# Altium PCB Injection_PCB.PcbDoc
Units mil, origin at the board's own origin, x right, y up, seen from the top; angles counter-clockwise.
Board outline 4645 x 2960 mil, 2 copper layers (Top Layer, Bottom Layer); 32 components, 45 nets, 272 pads, 86 vias.
Unrouted connection lines stored in the file: 66.
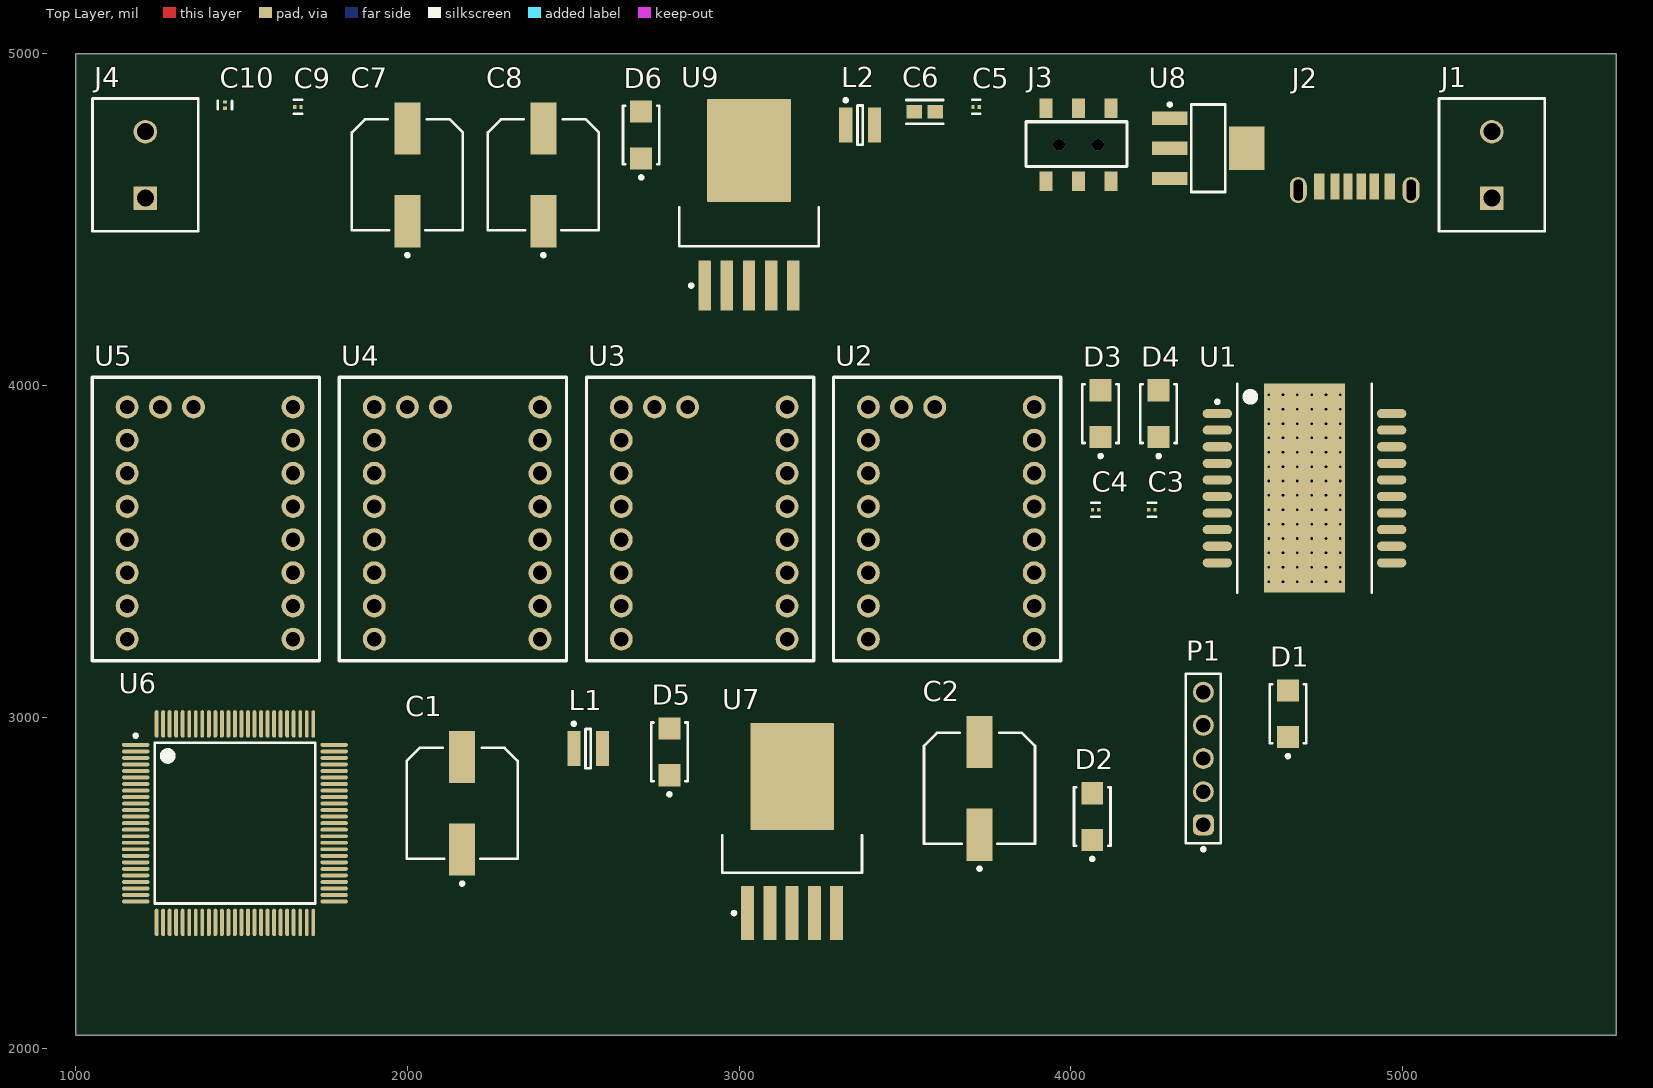
[diagram p0: Top Layer view]
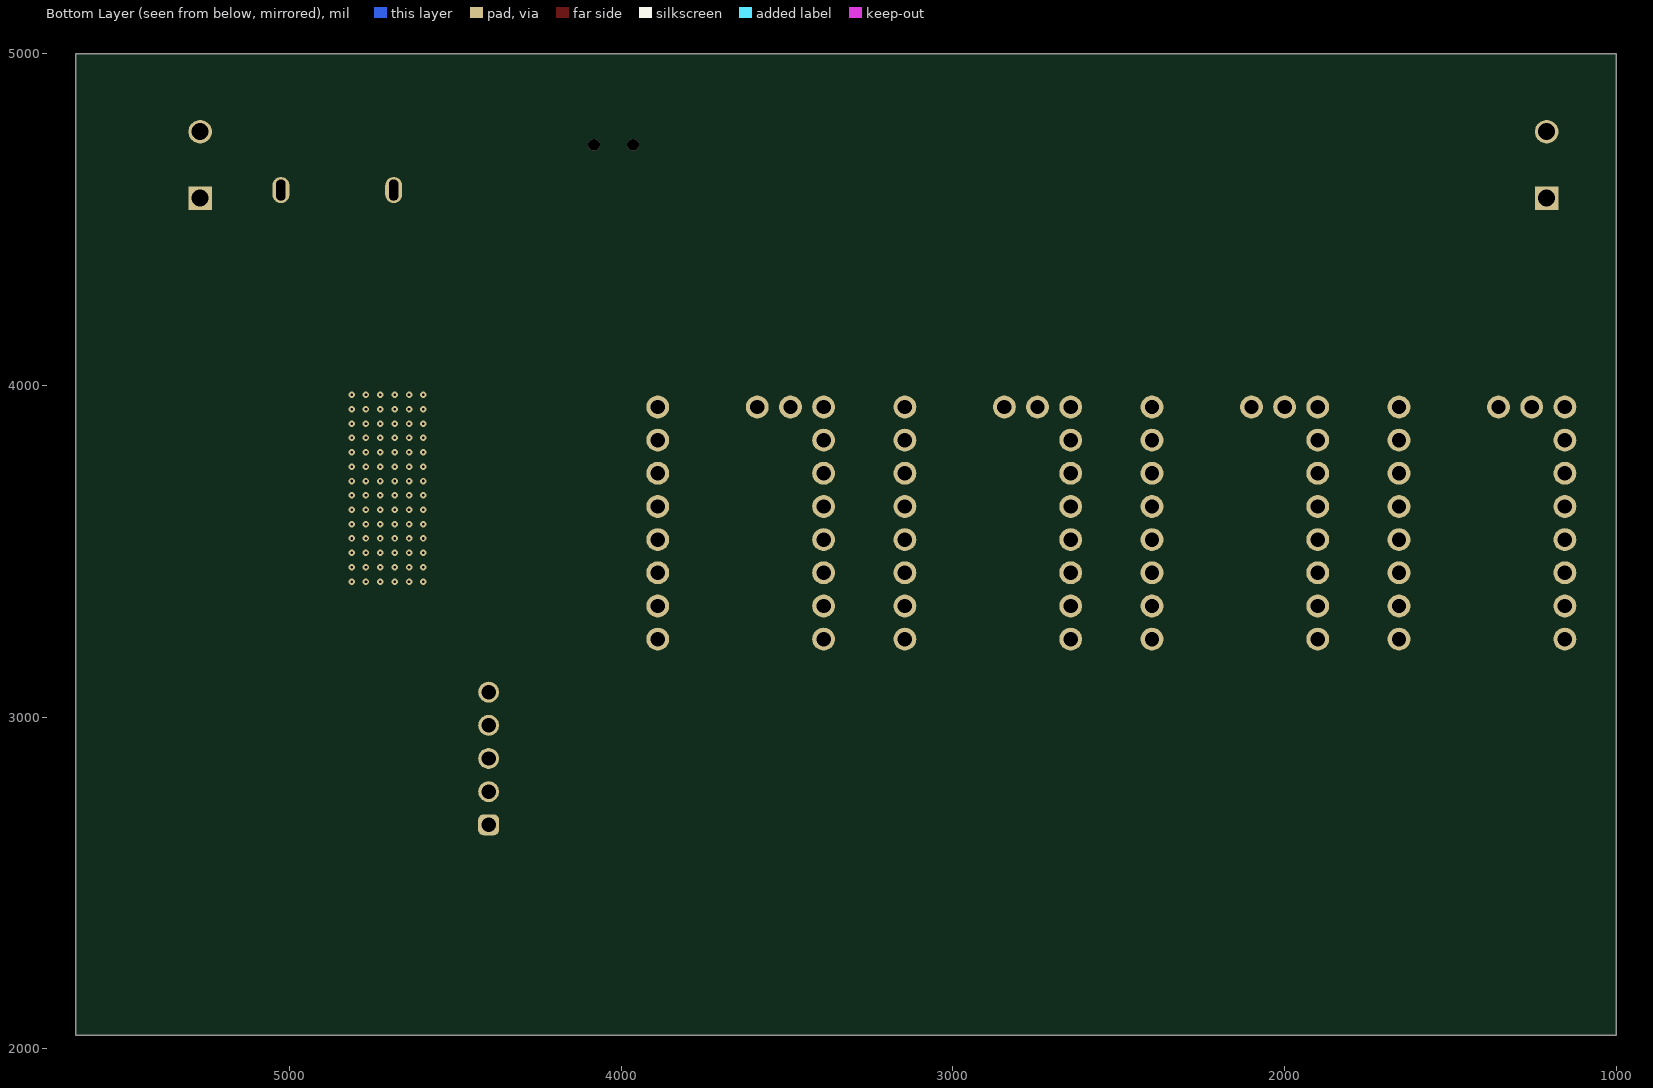
[diagram p1: Bottom Layer view, seen from below]

## Layer stack, top to bottom
Top Solder: solder mask 0.4, Solder Resist, Dk 3.5
Top Layer: signal copper 1.4
Dielectric 1: dielectric 12.6, FR-4, Dk 4.8
Bottom Layer: signal copper 1.4
Bottom Solder: solder mask 0.4, Solder Resist, Dk 3.5

## Board outline
1000,2040 5645,2040 5645,5000 1000,5000

## Design rules (kind name [scope] priority, off if disabled: settings)
Clearance [All] p1: gap=10 ignorepadtopadclearanceinfootprint=FALSE
PolygonConnect [All] p1: connectstyle=Relief reliefconductorwidth=10 reliefentries=4 polygonreliefangle="90 Angle" airgapwidth=10
RoutingVias [All] p1: holewidth=28 width=50 viastyle="Through Hole" minholewidth=28 minwidth=50 maxholewidth=28 maxwidth=50
SolderMaskExpansion [All] p1: expansion=4 istentingtop=FALSE
SupplyNets "Schematic Supply Nets_4" [InNet('GND')] p1: voltage=0.000
SupplyNets "Schematic Supply Nets_3" [InNet('+5')] p2: voltage=0.000
SupplyNets "Schematic Supply Nets_2" [InNet('+3.3')] p3: voltage=0.000
SupplyNets "Schematic Supply Nets_1" [InNet('+24')] p4: voltage=0.000
SupplyNets "Schematic Supply Nets" [InNet('VBUS')] p5: voltage=0.000
Width [All] p1: maxlimit=10 minlimit=10 preferedwidth=10
30 further rules are at their usual default settings.

## Classes and differential pairs
component class Power: C1 C2 C6 C7 C8 D5 D6 J1 J2 J3 J4 L1 L2 U7 U8 U9
component class Motor_Drivers: D1 D2 D3 D4 P1 U1 U2 U3 U4 U5
component class MCU: U6

## Components (designator, comment, footprint, x,y, rotation, side; value= is the part's Value field where it differs from the comment)
C1 "EEEFT1E471AP" FP-FTF-MFG 2165,2740 r90 top
C2 "EEEFT1E471AP" FP-FTF-MFG 3725,2785 r90 top
C3 "GRM033R60J104KE19D" FP-GRM033-0_03-MFG 4245,3625 r0 top
C4 "GRM033R60J104KE19D" FP-GRM033-0_03-MFG 4075,3625 r0 top
C5 "GRM033R60J104KE19D" FP-GRM033-0_03-MFG 3715,4840 r0 top
C6 "GRM188R60J106ME47D" FP-GRM188-0_1-e0_2_0_55-IPC_A 3560,4825 r0 top
C7 "EEEFT1E471AP" FP-FTF-MFG 2000,4635 r90 top
C8 "EEEFT1E471AP" FP-FTF-MFG 2410,4635 r90 top
C9 "GRM033R60J104KE19D" FP-GRM033-0_03-MFG 1670,4840 r0 top
C10 "GRM033R60J104KE19D" FP-GRM033-0_03-MFG 1450,4845 r90 top
D1 "SSA34-E3/61T" FP-95400-MFG 4655,3010 r90 top
D2 "SSA34-E3/61T" FP-95400-MFG 4065,2700 r90 top
D3 "SSA34-E3/61T" FP-95400-MFG 4090,3915 r90 top
D4 "SSA34-E3/61T" FP-95400-MFG 4265,3915 r90 top
D5 "SSA34-E3/61T" FP-95400-MFG 2790,2895 r90 top
D6 "SSA34-E3/61T" FP-95400-MFG 2705,4755 r90 top
J1 "1729128" PHOE-1729128-2_V 5270,4665 r90 top
J2 "USBC" USBC 4750,4600 r0 top
J3 "SWITCH" PCBComponent_1 3925,4615 r0 top
J4 "1729128" PHOE-1729128-2_V 1210,4665 r90 top
L1 "SRN3015-330M" BOUR-SRN3015-2_V 2545,2905 r0 top
L2 "SRN3015-470M" BOUR-SRN3015-2_V 3365,4785 r0 top
P1 "61300511121" 61300511121 4400,2875 r90 top
U1 "L298P" STM-PowerSO20_M 4705,3690 r0 top
U2 "TMC2209" TCM2209_breakout 3390,3235 r0 top
U3 "TMC2209" TCM2209_breakout 2645,3235 r0 top
U4 "TMC2209" TCM2209_breakout 1900,3235 r0 top
U5 "TMC2209" TCM2209_breakout 1155,3235 r0 top
U6 "STM32F407VET6" STM-LQFP100_M 1480,2680 r0 top
U7 "LM2596S-3.3" KTT0005B_N 3160,2655 r90 top
U8 "LD1117AS33TR" SOT-223_M 4415,4715 r0 top
U9 "LM2596S-5.0" KTT0005B_L 3030,4545 r90 top

## Footprints (in the part's own frame and the unit in brackets; to place one, negate y for a bottom-side part, rotate by r counter-clockwise, add the part's x,y. Pads: shape width x height; smd on the part's side, far side on the other; paste and mask are expansions set on the pad)
61300511121 [mm] "Pin Header, pitch 2.54 mm, THT, Vertical, single row, 5p"
  rrect50% 1.6x1.6 hole 1.1: 1(-5.08,0)
  round 1.6 hole 1.1: 2(-2.54,0) 3(0,0) 4(2.54,0) 5(5.08,0)
  silkscreen extent -7.07,-1.35 6.5,1.35, body extent -6.35,-1.27 6.35,1.27, height 8.57
BOUR-SRN3015-2_V [mm] "SMD, 2-Leads, Body 3x3mm, Height 1.5mm"
  rect 1x2.7 smd: 1(-1.1,0) 2(1.1,0)
  silkscreen extent -1.22,-1.5 0.2,2.02, body extent -1.5,-1.5 1.5,1.5, height 1.5
FP-95400-MFG [mm]
  rect 1.7x1.68 smd paste+0 mask+0: 1(-1.79,0) 2(1.79,0)
  silkscreen extent -3.37,-1.4 2.25,1.4, body extent -2.74,-1.5 2.74,1.5, height 0.25
FP-FTF-MFG [mm]
  rect 4x2 smd paste+0 mask+0: 1(-3.55,0) 2(3.55,0)
  silkscreen extent -6.27,-4.25 4.25,4.25, body extent -5.8,-4.5 5.8,4.5, height 0.25
FP-GRM033-0_03-MFG [mm]
  rect 0.25x0.3 smd paste+0 mask+0: 1(-0.238,0) 2(0.238,0)
  silkscreen extent -0.32,-0.54 0.32,0.54, body extent -0.46,-0.27 0.46,0.27, height 0.25
FP-GRM188-0_1-e0_2_0_55-IPC_A [mil]
  rect 47.57x39.85 smd paste+0 mask+0: 1(-31.57,0) 2(31.57,0)
  silkscreen extent -55,-36 55,36, body extent -75,-40 75,40, height 10
KTT0005B_L [mm] "DPAK, 5-Leads, Body 10.65x9.65mm, Pitch 1.7mm, IPC High Density"
  rrect11% 3.85x0.95 smd: 1(-6.2,3.4) 2(-6.2,1.7) 3(-6.2,0) 4(-6.2,-1.7) 5(-6.2,-3.4)
  rrect2% 7.9x6.4 smd: 6(4.15,0)
  silkscreen extent -6.32,-5.35 -0.2,5.35, body extent -3.2,-5.32 6.45,5.33, height 4.83
KTT0005B_N [mm] "DPAK, 5-Leads, Body 10.65x9.65mm, Pitch 1.7mm, IPC Medium Density"
  rrect10% 4.15x1 smd: 1(-6.25,3.4) 2(-6.25,1.7) 3(-6.25,0) 4(-6.25,-1.7) 5(-6.25,-3.4)
  rrect2% 8.2x6.4 smd: 6(4.2,0)
  silkscreen extent -6.37,-5.35 -0.3,5.35, body extent -3.15,-5.32 6.5,5.33, height 4.83
PCBComponent_1 [mm]
  rect 1x1.5 smd: 1(0,0) 2(2.5,0) 3(5,0) 4(0,5.6) 5(2.5,5.6) 6(5,5.6)
  silkscreen extent -1.52,1.14 6.22,4.57
PHOE-1729128-2_V [mm] "Receptacle, 2-Leads, Body 8.1x10.16mm, Pitch 5.08mm"
  rect 1.8x1.8 hole 1.3: 1(-2.54,0)
  round 1.8 hole 1.3: 2(2.54,0)
  silkscreen extent -5.08,-4.05 5.08,4.05, body extent -5.65,-4.05 5.08,4.05, height 10.01
SOT-223_M [mm] "SOT223, 4-Leads, Body 6.5x3.5mm, Pitch 2.3mm, Lead Span 7mm, IPC Low Density"
  rect 2.7x1 smd: 1(-2.95,2.3) 2(-2.95,0) 3(-2.95,-2.3)
  rect 2.7x3.3 smd: 4(2.95,0)
  silkscreen extent -3.07,-3.35 1.3,3.47, body extent -1.85,-3.35 1.85,3.35, height 1.8
STM-LQFP100_M [mm] "Thin QFP, 100-Leads, Body 14x14mm, Pitch 0.5mm, IPC Low Density"
  oval 2.1x0.3 smd: 1(-7.6,6) 2(-7.6,5.5) 3(-7.6,5) 4(-7.6,4.5) 5(-7.6,4) 6(-7.6,3.5) 7(-7.6,3) 8(-7.6,2.5) 9(-7.6,2) 10(-7.6,1.5) 11(-7.6,1) 12(-7.6,0.5) 13(-7.6,0) 14(-7.6,-0.5) 15(-7.6,-1) 16(-7.6,-1.5) 17(-7.6,-2) 18(-7.6,-2.5) 19(-7.6,-3) 20(-7.6,-3.5) 21(-7.6,-4) 22(-7.6,-4.5) 23(-7.6,-5) 24(-7.6,-5.5) 25(-7.6,-6) 51(7.6,-6) 52(7.6,-5.5) 53(7.6,-5) 54(7.6,-4.5) 55(7.6,-4) 56(7.6,-3.5) 57(7.6,-3) 58(7.6,-2.5) 59(7.6,-2) 60(7.6,-1.5) 61(7.6,-1) 62(7.6,-0.5) 63(7.6,0) 64(7.6,0.5) 65(7.6,1) 66(7.6,1.5) 67(7.6,2) 68(7.6,2.5) 69(7.6,3) 70(7.6,3.5) 71(7.6,4) 72(7.6,4.5) 73(7.6,5) 74(7.6,5.5) 75(7.6,6)
  oval 0.3x2.1 smd: 26(-6,-7.6) 27(-5.5,-7.6) 28(-5,-7.6) 29(-4.5,-7.6) 30(-4,-7.6) 31(-3.5,-7.6) 32(-3,-7.6) 33(-2.5,-7.6) 34(-2,-7.6) 35(-1.5,-7.6) 36(-1,-7.6) 37(-0.5,-7.6) 38(0,-7.6) 39(0.5,-7.6) 40(1,-7.6) 41(1.5,-7.6) 42(2,-7.6) 43(2.5,-7.6) 44(3,-7.6) 45(3.5,-7.6) 46(4,-7.6) 47(4.5,-7.6) 48(5,-7.6) 49(5.5,-7.6) 50(6,-7.6) 76(6,7.6) 77(5.5,7.6) 78(5,7.6) 79(4.5,7.6) 80(4,7.6) 81(3.5,7.6) 82(3,7.6) 83(2.5,7.6) 84(2,7.6) 85(1.5,7.6) 86(1,7.6) 87(0.5,7.6) 88(0,7.6) 89(-0.5,7.6) 90(-1,7.6) 91(-1.5,7.6) 92(-2,7.6) 93(-2.5,7.6) 94(-3,7.6) 95(-3.5,7.6) 96(-4,7.6) 97(-4.5,7.6) 98(-5,7.6) 99(-5.5,7.6) 100(-6,7.6)
  silkscreen extent -7.72,-6.15 6.15,6.82, body extent -7,-7 7,7, height 1.6
STM-PowerSO20_M [mm] "SOIC, 20-Leads, Body 16x11.1mm, Pitch 1.27mm, Thermal Pad 16x6.2mm, IPC Low Density"
  oval 2.25x0.7 smd: 1(-6.675,5.715) 2(-6.675,4.445) 3(-6.675,3.175) 4(-6.675,1.905) 5(-6.675,0.635) 6(-6.675,-0.635) 7(-6.675,-1.905) 8(-6.675,-3.175) 9(-6.675,-4.445) 10(-6.675,-5.715) 11(6.675,-5.715) 12(6.675,-4.445) 13(6.675,-3.175) 14(6.675,-1.905) 15(6.675,-0.635) 16(6.675,0.635) 17(6.675,1.905) 18(6.675,3.175) 19(6.675,4.445) 20(6.675,5.715)
  rect 6.2x16 smd: 21(0,0)
  silkscreen extent -6.8,-8 5.15,8, body extent -7.1,-8 7.1,8, height 3.6
TCM2209_breakout [mm]
  round 1.75 hole 1.1: 1(0,17.78) 2(0,15.24) 3(0,12.7) 4(0,10.16) 5(0,7.62) 6(0,5.08) 7(0,2.54) 8(0,0) 9(12.7,0) 9(12.7,0) 10(12.7,2.54) 11(12.7,5.08) 12(12.7,7.62) 13(12.7,10.16) 14(12.7,12.7) 15(12.7,15.24) 16(12.7,17.78) 17(5.08,17.78) 18(2.54,17.78)
  silkscreen extent -2.67,-1.65 14.73,20.07, body extent -1.27,-1.27 13.97,19.05, height 16.75
USBC [mm]
  rect 0.8x2 smd: 1(0,0) 6(5.4,0)
  rect 0.7x2 smd: 2(1.2,0) 3(2.2,0) 4(3.2,0) 5(4.2,0)
  oval 1.3x2 hole 0.7 slot 1.6 at 90 deg: ""(-1.62,-0.28) ""(7.02,-0.28)
  body extent -1.83,-1.18 7.37,6.77, height 3.2

## Part data
C1 C2 C7 C8: library part CMP-05427-000040-1, "CAP ALUM 470UF 20% 25V SMD", Capacitance=470uF, Case/Package=Radial, Dielectric Material=Aluminium, ESR (Equivalent Series Resistance)=80mR, LCSC=C178591, Leakage Current=117.5uA, Max Operating Temperature=105°C, Min Operating Temperature=-55°C, Package Quantity=500, Ripple Current=850mA, Tolerance=20%, Voltage=25V, Construction=Cylindrical, Contact Plating=Tin, Diameter=8mm, Features="General Purpose", Height=10.2mm, Height - Seated (Max)=0.413inch, Lead Diameter=0.9mm, Lead Free="Lead Free", Lead Pitch=3.1mm, Length=10.2mm, Life (Hours)=2000Hour, Mount="Surface Mount", Number of Pins=2, Packaging="Tape and Reel", Radiation Hardening=No, REACH SVHC="No SVHC", Ripple Current (AC)=850mA, RoHS Compliant=Yes, Series=FT, Termination=SMD/SMT, Voltage Rating=25V, Voltage Rating (DC)=25V
C3 C4 C5 C9 C10: library part CMP-06035-000062-2, "Chip Multilayer Ceramic Capacitors for General Purpose, 0201, 0.10uF, X5R, 15%, 10%, 6.3V", Capacitance=100nF, Case Code (Imperial)=0201, Case Code (Metric)=0603, Dielectric=X5R, Max Operating Temperature=85°C, Min Operating Temperature=-55°C, Package Quantity=1, Tolerance=10%, Voltage=6.3V, Case/Package=0201, Depth=0.3mm, Height=0.3mm, Lead Free="Lead Free", Length=0.6mm, Material=Ceramic, Mount="Surface Mount", Packaging="Tape and Reel", Radiation Hardening=No, REACH SVHC="No SVHC", Termination=SMD/SMT, Thickness=0.013inch, Voltage Rating=6.3V, Voltage Rating (DC)=6.3V, Weight=6E-06oz, Width=0.012inch
C6: library part CMP-2006-02792-2, "Chip Multilayer Ceramic Capacitors for General Purpose, 0603, 10uF, X5R, 15%, 20%, 6.3V", Capacitance=10uF, Case Code (Imperial)=0603, Case Code (Metric)=1608, Dielectric=X5R, LCSC=C385035, Max Operating Temperature=85°C, Min Operating Temperature=-55°C, Package Quantity=4000, Tolerance=20%, Voltage=6.3V, Case/Package=0603, Depth=0.8mm, Height=0.8mm, Lead Free="Lead Free", Length=1.6mm, Material=Ceramic, Mount="Surface Mount", Packaging="Tape and Reel", Radiation Hardening=No, REACH SVHC="No SVHC", Termination=SMD/SMT, Thickness=0.035inch, Voltage Rating=6.3V, Voltage Rating (DC)=6.3V, Width=0.031inch
D1 D2 D3 D4 D5 D6: library part CMP-02539-000022-2, "DIODE SCHOTTKY 40V 3A DO214AC", Average Rectified Current=3A, Case/Package=SMA, Forward Voltage=490mV, LCSC=C466998, Max Forward Surge Current (Ifsm)=75A, Max Operating Temperature=150°C, Max Repetitive Reverse Voltage (Vrrm)=40V, Max Reverse Current=200uA, Min Operating Temperature=-65°C, Package Quantity=1, Contact Plating=Tin, Current Rating=3A, Element Configuration=Single, Forward Current=3A, Height=2.087mm, Lead Free="Lead Free", Length=4.5mm, Max Reverse Leakage Current=200uA, Max Reverse Voltage (DC)=40V, Max Surge Current=75A, Mount="Surface Mount", Number of Pins=2, Output Current=3A, Packaging="Tape and Reel", Peak Non-Repetitive Surge Current=75A, Polarity=Standard, Radiation Hardening=No, RoHS Compliant=Yes, Voltage Rating (DC)=40V, Width=2.79mm
J1 J4: library part CMP-2000-05815-1, "PCB Terminal Block, 13.5 A, 400 V, 2-Pin THD, RoHS, Bulk", Current Rating=13500mA, Manufacturer="Phoenix Contact", Package Description="2-Pin Through Hole Device, Body 8.1 x 10.16 mm, Pitch 5.08 mm", Package Reference=1729128-2, Package Version=03/2015, Voltage Rating=400V, Datasheet URL=https://datasheet.ciiva.com/16046/1729128-16046181.pdf, Datasheet Version=12/2013, Manufacturer URL=http://www.phoenixcontact.com/, Mounting Technology=ThroughHole, No. of Positions=2, No. of Rows=1, Orientation=Horizontal, Package URL=https://www.phoenixcontact.com/online/portal/pi/pxc/product_detail_page/!ut/p/b1/3VdJjqNKFDxLH8AFycySyWY2ozFsEPOMMQaDOX1XedGL_1Vdm5YXJleknhSKeBkvI6EA8ncAo3AYoDhBQGco6KN7VURTdemj9us_IEKEZo_YHiPAEWEFmDGOHMORkqKYCORBZxgL7ZoaZYcbFFUZ3fqxSY6GOuxydWUuHqz1ynmMFygu583Bob0Ewr6Sd_l-5m-kAueHiB0jpRwZwe58wwtkpxtMYd_LmGcDRU02dRNEyWt6Y2ti5pSyJ_reIkzIulrqApdnbT11V5jnCKbYNCvhEM1MCpPByat_X379-iThf08CI5GfOPqfBeS3BRoBOdD55AKVv0iLwCMq-2BrzXWSGRH7pUGD9uwXQjiph3xL0DKQwdGa0JImiIOmBNOestqgwTHSSs2oOep-78apyXQBvNi8ZLaFjvjWvcaUEBu0MC6Wbe-d6mB0FAebo2lUWinqYaZs5DAYzV0RP9yitUjnGJ0iI9xhZkT42OCQNUJJhkgWINNQLP2JFP6OpMg3JCVg70jqHT0lvKOnhHf0lPuOnnLf0VPuWx6_dxwUIvwk5WMkT0kLL1mh61l2yZVSzG3pYV_bqo-mj6uMKwKwdnnW8Jh5RTOJzMOA5c-eJDaZQw4mTMPH02PvS_ZAqNVjVTo2WyYLkwH_KU1mmmG5kjRhDqPXLwwVHvVOjCM60-fpXvTDfMGW1PVFVS1r4e4yVDk4ZdNbkUHvqPqQSeian4UD39fNKmachqdJ1NJbyk8rXT9mXTvPk3oE5meulKGgiruPJek-4I9hTT6G8ZLOyRSm2RRVbThERQad5OS28hdt4YW4vG0stgYYzsWsK4_7y6DZMjJSCqri1kyiZR5vD7pwIrNR7QwPHTcLTI5qT7eRlpHrdGiupYlqQDJ7zy_CND8fWWBoLRXxk1RVcXiBQwbTD4Xi7KL-FuO94t9xaqweXzH, Packing=Bulk, PartNumber=1729128, Pitch=5.08mm, RoHS=TRUE
J2: LCSC=C5187411
J3: library part SMD_SWITCH, LCSC=C2837066
L1: library part CMP-0007-00002-1, "Semi-shielded Power Inductor, 33 uH, +/- 20%, 0.5 A, -40 to 125 degC, 3 x 3 x 1.5 mm SMD, RoHS and Halogen Free, Tape and Reel", Inductance="33 uH", Inductance tolerance="+/- 20%", LCSC=C2903004, Manufacturer=Bourns, Operating Temperature="-40 to 125 degC", Rated current="0.5 A", Resistance to Solder Heat="+260 degC for 10 sec.", ComponentLink1Description="Manufacturer URL", ComponentLink1URL=http://www.bourns.com/, ComponentLink2Description=Datasheet, ComponentLink2URL=http://www.bourns.com/data/global/pdfs/SRN3015.pdf, ComponentLink3Description="Package Specification", ComponentLink3URL=http://www.bourns.com/data/global/pdfs/SRN3015.pdf, DatasheetVersion=Aug-11, DCR Max="0.959 Ohm", Isat="0.46 A", Mounting Technology="Surface Mount", PackageDescription="2-Pin SMD, Body 3 x 3 mm, Height 1.5 mm", PackageReference=SRN3015, Packing="Tape and Reel", PartNumber=SRN3015-330M, RoHS=TRUE, SRF Min="22 MHz"
L2: library part CMP-0007-00006-1, "Semi-shielded Power Inductor, 47 uH, +/- 20%, 0.4 A, -40 to 125 degC, 3 x 3 x 1.5 mm SMD, RoHS and Halogen Free, Tape and Reel", Inductance="47 uH", Inductance tolerance="+/- 20%", LCSC=C3222246, Manufacturer=Bourns, Operating Temperature="-40 to 125 degC", Rated current="0.4 A", Resistance to Solder Heat="+260 degC for 10 sec.", ComponentLink1Description="Manufacturer URL", ComponentLink1URL=http://www.bourns.com/, ComponentLink2Description=Datasheet, ComponentLink2URL=http://www.bourns.com/data/global/pdfs/SRN3015.pdf, ComponentLink3Description="Package Specification", ComponentLink3URL=http://www.bourns.com/data/global/pdfs/SRN3015.pdf, DatasheetVersion=Aug-11, DCR Max="1.406 Ohm", Isat="0.38 A", Mounting Technology="Surface Mount", PackageDescription="2-Pin SMD, Body 3 x 3 mm, Height 1.5 mm", PackageReference=SRN3015, Packing="Tape and Reel", PartNumber=SRN3015-470M, RoHS=TRUE, SRF Min="18 MHz"
P1: library part CMP-1502-01068-3, Color=Black, Contact Resistance=20mΩ, Current Rating=3A, Max Operating Temperature=105°C, Min Operating Temperature=-40°C, Operating Supply Voltage=250V, Connector Type="Male Pin", Contact Material=Copper, Contact Mating Length=5.9944mm, Contact Plating=Gold, Gender=Male, Height=8.89mm, Lead Free="Lead Free", Lead Pitch=2.54mm, Mount="Through Hole", NexarPartId=32855526, Number of Contacts=5, Number of Pins=5, Number of Positions=5, Number of Rows=1, Orientation=Vertical, Packaging=Bulk, Pitch=2.54mm, REACH SVHC=Unknown, RoHS=Compliant, Termination=Solder, Voltage Rating=250V
U1: library part CMP-2100-03649-1, "Dual Full-Bridge Driver, 4.5 to 7 V, -25 to 130 degC, 20-Pin SOIC, RoHS, Tube", Case/Package=SOIC, Collector Emitter Voltage (VCEO)=46V, LCSC=C17179540, Manufacturer=STMicroelectronics, Max Collector Current=3A, Max Operating Temperature=130degC, Min Operating Temperature=-25degC, Min Supply Voltage=4.8V, Operating Supply Current=13mA, Output Current=2A, Package Description="20-Pin Small Outline Integrated Circuits, Body 15.9 x 11 mm, Pitch 1.27 mm", Package Quantity=31, Package Reference=PowerSO20, Supply Voltage=42V, Datasheet URL=http://www.st.com/content/ccc/resource/technical/document/datasheet/82/cc/3f/39/0a/29/4d/f0/CD00000240.pdf/files/CD00000240.pdf/jcr:content/translations/en.CD00000240.pdf, Datasheet Version=36526.0, Height=3.3mm, Lead Free=LeadFree, Length=16mm, Manufacturer URL=http://www.st.com/, Max Output Current=3A, Max Supply Voltage=46V, Mount=SurfaceMount, Number of Channels=2, Number of Pins=20, Output Current per Channel=2A, Packaging=Rail/Tube, Radiation Hardening=No, RoHSCompliant=true, Width=11.1mm
U2 U3 U4 U5: library part TMC2209_plug
U6: library part CMP-0243-00016-3, "ARM Cortex-M4 32-bit MCU+FPU, 210 DMIPS, 512 kB Flash, 192 kB Internal RAM, 82 I/Os, 100-pin LQFP, -40 to 85 degC, Tray", I/Os (High Current)=82, LCSC=C28730, Manufacturer=STMicroelectronics, Operating Frequency(F) (Processor speed) (MHz)=168, Supply Voltage(Vcc) max (V)=3.6, Supply Voltage(Vcc) min (V)=1.8, ComponentLink1Description="Manufacturer URL", ComponentLink1URL=http://www.st.com/web/en/home.html, ComponentLink2Description=Datasheet, ComponentLink2URL=http://www.st.com/st-web-ui/static/active/en/resource/technical/document/datasheet/DM00037051.pdf, ComponentLink3Description="Package Specification", ComponentLink3URL=http://www.st.com/st-web-ui/static/active/en/resource/technical/document/data_brief/DM00071938.pdf, Core="ARM Cortex-M4", D/A Converter=2x12-bit, DatasheetVersion="Rev. 4", FLASH Size (Prog) (kB)=512, Internal RAM Size (kB)=192, Mounting Technology="Surface Mount", PackageDescription="100-Pin Low Profile Quad Flat Package, 14 x 14 mm Body, 0.5 mm Pitch", PackageReference=LQFP100, PackageVersion="Rev. 1, 06/2013", Packing=Tray, PartNumber=STM32F407VET6
U7: library part CMP-0069-00276-3, "SIMPLE SWITCHER® Power Converter 150 KHz 3A Step-Down Voltage Regulator, 5-pin TO-263", Manufacturer="Texas Instruments", PackageTopMarking="NSUZXYTTE#*LM2596S*-3.3 P+", PowerWise=N, Code_JEDEC=MO-169-AB, ComponentLink1Description="Datasheet URL", ComponentLink1URL=http://www.ti.com/general/docs/lit/getliterature.tsp?genericPartNumber=LM2596&fileType=pdf, CompType=Switcher, PackageDescription="TO-263, Molded, .400 x .390 x .180in, 5 Lead, .067in Pitch, Surface Mount", PackageReference=KTT0005B, PinCount=5, RoHS=N
U8: library part CMP-0244-00316-1, "1A, Low Drop Positive Voltage Regulator, 3.3V, 4-Pin SOT-223, Tape and Reel", ComponentLink1Description="Manufacturer URL", ComponentLink1URL=http://www.st.com, ComponentLink2Description=Datasheet, ComponentLink2URL=http://www.st.com/internet/com/TECHNICAL_RESOURCES/TECHNICAL_LITERATURE/DATASHEET/CD00002116.pdf, DatasheetVersion=2/12/2011, PackageDescription="4-Pin SOT-223 Package, 6.5 x 3.5 mm Body, 2.3 mm Pitch, 7 mm Lead Span", PackageReference=SOT-223, PackageVersion=2010
U9: library part CMP-0069-00270-3, "SIMPLE SWITCHER® Power Converter 150 KHz 3A Step-Down Voltage Regulator, 5-pin TO-263", LCSC=C347421, Manufacturer="Texas Instruments", PackageTopMarking="NSUZXYTTE#*LM2596S*-5.0 P+", PowerWise=N, Code_JEDEC=MO-169-AB, ComponentLink1Description="Datasheet URL", ComponentLink1URL=http://www.ti.com/general/docs/lit/getliterature.tsp?genericPartNumber=LM2596&fileType=pdf, CompType=Switcher, PackageDescription="TO-263, Molded, .400 x .390 x .180in, 5 Lead, .067in Pitch, Surface Mount", PackageReference=KTT0005B, PinCount=5, RoHS=N

## Via types
v1: diameter 19.68, hole 7.87, Top Layer to Bottom Layer, 84 vias
v2: diameter 35.43, hole 35.43, Top Layer to Bottom Layer, 2 vias

## Nets (pads, with @x,y where several pads share a name; then routed paths per layer and width w, separated by ;. In a path a pad name is that pad's centre, name@x,y a point inside that pad or via, vN(x,y) a via of type N, cw(c..) or ccw(c..) an arc to the next point about the centre after c; other vN are vias at no path point)
+3.3: C2.2 C3.1 C6.1 L1.2 P1.5 U7.4 U8.2 U8.4
+5: C8.2 C9.1 D1.1 D2.1 J4.1 L2.2 U1.12 U9.4
+24: C1.2 C4.1 C7.2 C10.1 J1.1 U7.1 U9.1
ADC1_IN0_ACT: P1.2 U6.23
ADC1_IN1_ROT1: U6.24
ADC1_IN2_ROT2: U6.25
DIR1: U6.41
DIR2: U6.43
DIR3: U6.39
DIR4: U6.46
DIR5: U6.31
DIR6: U6.88
GND: C1.1 C2.1 C3.2 C4.2 C5.2 C6.2 C7.1 C8.1 C9.2 C10.2 D3.2 D4.2 D5.2 D6.2 J1.2 J4.2 P1.1 U1.1 U1.10 U1.11 U1.20 U1.21 U7.3 U7.5 U7.6 U8.1 U9.3 U9.5 U9.6
  other v1: 4596.73,3408.5 4640.04,3408.5 4683.35,3408.5 4726.65,3408.5 4769.96,3408.5 4813.27,3408.5 4596.73,3451.81 4640.04,3451.81 4683.35,3451.81 4726.65,3451.81 4769.96,3451.81 4813.27,3451.81 4596.73,3495.12 4640.04,3495.12 4683.35,3495.12 4726.65,3495.12 4769.96,3495.12 4813.27,3495.12 4596.73,3538.43 4640.04,3538.43 4683.35,3538.43 4726.65,3538.43 4769.96,3538.43 4813.27,3538.43 4596.73,3581.73 4640.04,3581.73 4683.35,3581.73 4726.65,3581.73 4769.96,3581.73 4813.27,3581.73 4596.73,3625.04 4640.04,3625.04 4683.35,3625.04 4726.65,3625.04 4769.96,3625.04 4813.27,3625.04 4596.73,3668.35 4640.04,3668.35 4683.35,3668.35 4726.65,3668.35 4769.96,3668.35 4813.27,3668.35 4596.73,3711.65 4640.04,3711.65 4683.35,3711.65 4726.65,3711.65 4769.96,3711.65 4813.27,3711.65 4596.73,3754.96 4640.04,3754.96 4683.35,3754.96 4726.65,3754.96 4769.96,3754.96 4813.27,3754.96 4596.73,3798.27 4640.04,3798.27 4683.35,3798.27 4726.65,3798.27 4769.96,3798.27 4813.27,3798.27 4596.73,3841.57 4640.04,3841.57 4683.35,3841.57 4726.65,3841.57 4769.96,3841.57 4813.27,3841.57 4596.73,3884.88 4640.04,3884.88 4683.35,3884.88 4726.65,3884.88 4769.96,3884.88 4813.27,3884.88 4596.73,3928.19 4640.04,3928.19 4683.35,3928.19 4726.65,3928.19 4769.96,3928.19 4813.27,3928.19 4596.73,3971.5 4640.04,3971.5 4683.35,3971.5 4726.65,3971.5 4769.96,3971.5 4813.27,3971.5
I2C1_SCL: U6.95
I2C1_SDA: U6.93
IN1: U1.7 U6.34
IN2: U1.9 U6.35
LED: U6.7
NetC5_1: C5.1 J3.4 J3.5 U8.3
NetD1_2: D1.2 D3.1 P1.3 U1.4
NetD2_2: D2.2 D4.1 P1.4 U1.5
NetD5_1: D5.1 L1.1 U7.2
NetD6_1: D6.1 L2.1 U9.2
SWCLK: U6.76
SWDIO: U6.72
TIM1_CH1: U6.40
TIM1_CH2: U6.42
TIM1_CH3: U6.44
TIM1_CH4: U6.45
TIM2_CH1: U6.30
TIM2_CH2: U6.89
TIM2_CH3: U1.8 U6.47
UART4_RX: U6.79
UART4_TX: U6.78
UART5_RX: U6.83
UART5_TX: U6.80
USART1_RX: U6.69
USART1_TX: U6.92
USART2_RX: U6.26
USART2_TX: U6.86
USART3_RX: U6.48
USART3_TX: U6.55
USB_OTG_FS_DM: U6.70
USB_OTG_FS_DP: U6.71
VBUS: J3.1 J3.2
pads on no net: J2. J2.1 J2.2 J2.3 J2.4 J2.5 J2.6 J3.3 J3.6 U1.2 U1.3 U1.6 U1.13 U1.14 U1.15 U1.16 U1.17 U1.18 U1.19 U2.1 U2.2 U2.3 U2.4 U2.5 U2.6 U2.7 U2.8 U2.9 U2.10 U2.11 U2.12 U2.13 U2.14 U2.15 U2.16 U2.17 U2.18 U3.1 U3.2 U3.3 U3.4 U3.5 U3.6 U3.7 U3.8 U3.9 U3.10 U3.11 U3.12 U3.13 U3.14 U3.15 U3.16 U3.17 U3.18 U4.1 U4.2 U4.3 U4.4 U4.5 U4.6 U4.7 U4.8 U4.9 U4.10 U4.11 U4.12 U4.13 U4.14 U4.15 U4.16 U4.17 U4.18 U5.1 U5.2 U5.3 U5.4 U5.5 U5.6 U5.7 U5.8 U5.9 U5.10 U5.11 U5.12 U5.13 U5.14 U5.15 U5.16 U5.17 U5.18 U6.1 U6.2 U6.3 U6.4 U6.5 U6.6 U6.8 U6.9 U6.10 U6.11 U6.12 U6.13 U6.14 U6.15 U6.16 U6.17 U6.18 U6.19 U6.20 U6.21 U6.22 U6.27 U6.28 U6.29 U6.32 U6.33 U6.36 U6.37 U6.38 U6.49 U6.50 U6.51 U6.52 U6.53 U6.54 U6.56 U6.57 U6.58 U6.59 U6.60 U6.61 U6.62 U6.63 U6.64 U6.65 U6.66 U6.67 U6.68 U6.73 U6.74 U6.75 U6.77 U6.81 U6.82 U6.84 U6.85 U6.87 U6.90 U6.91 U6.94 U6.96 U6.97 U6.98 U6.99 U6.100
copper on no net:
  other v2: 3964.37,4725.24 4082.48,4725.24